# Altium PCB Main.PcbDoc
Units mil, origin at the board's own origin, x right, y up, seen from the top; angles counter-clockwise.
Board outline 1600 x 3464 mil, 2 copper layers (Top Layer, Bottom Layer), stack 61.811 mil thick; 62 components, 30 nets, 155 pads, 84 vias.
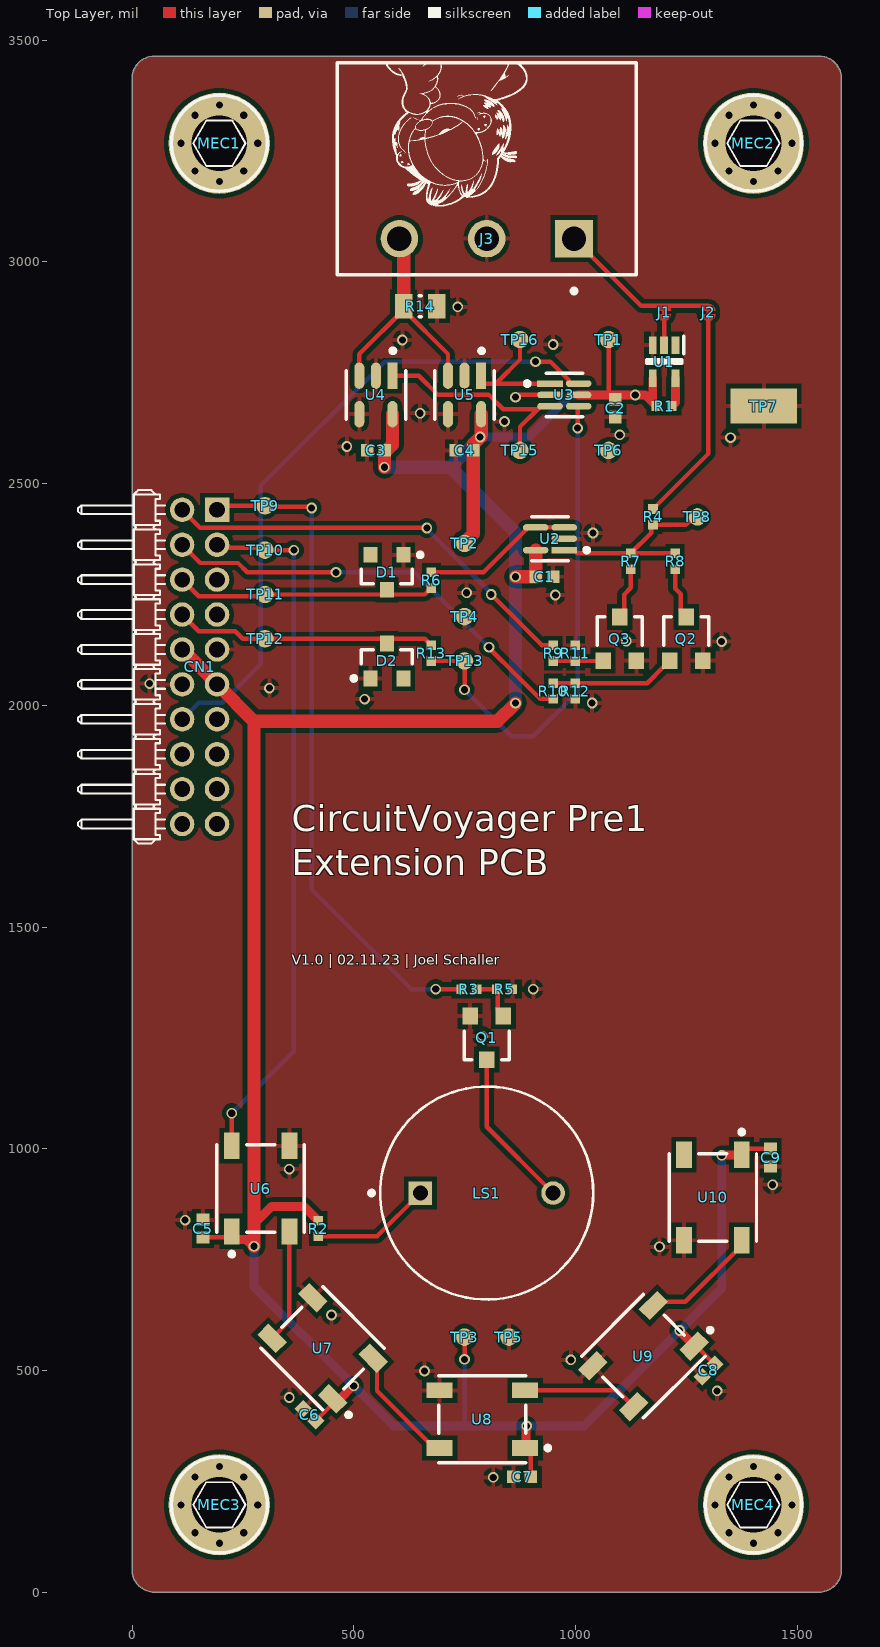
[diagram p0: Top Layer view]
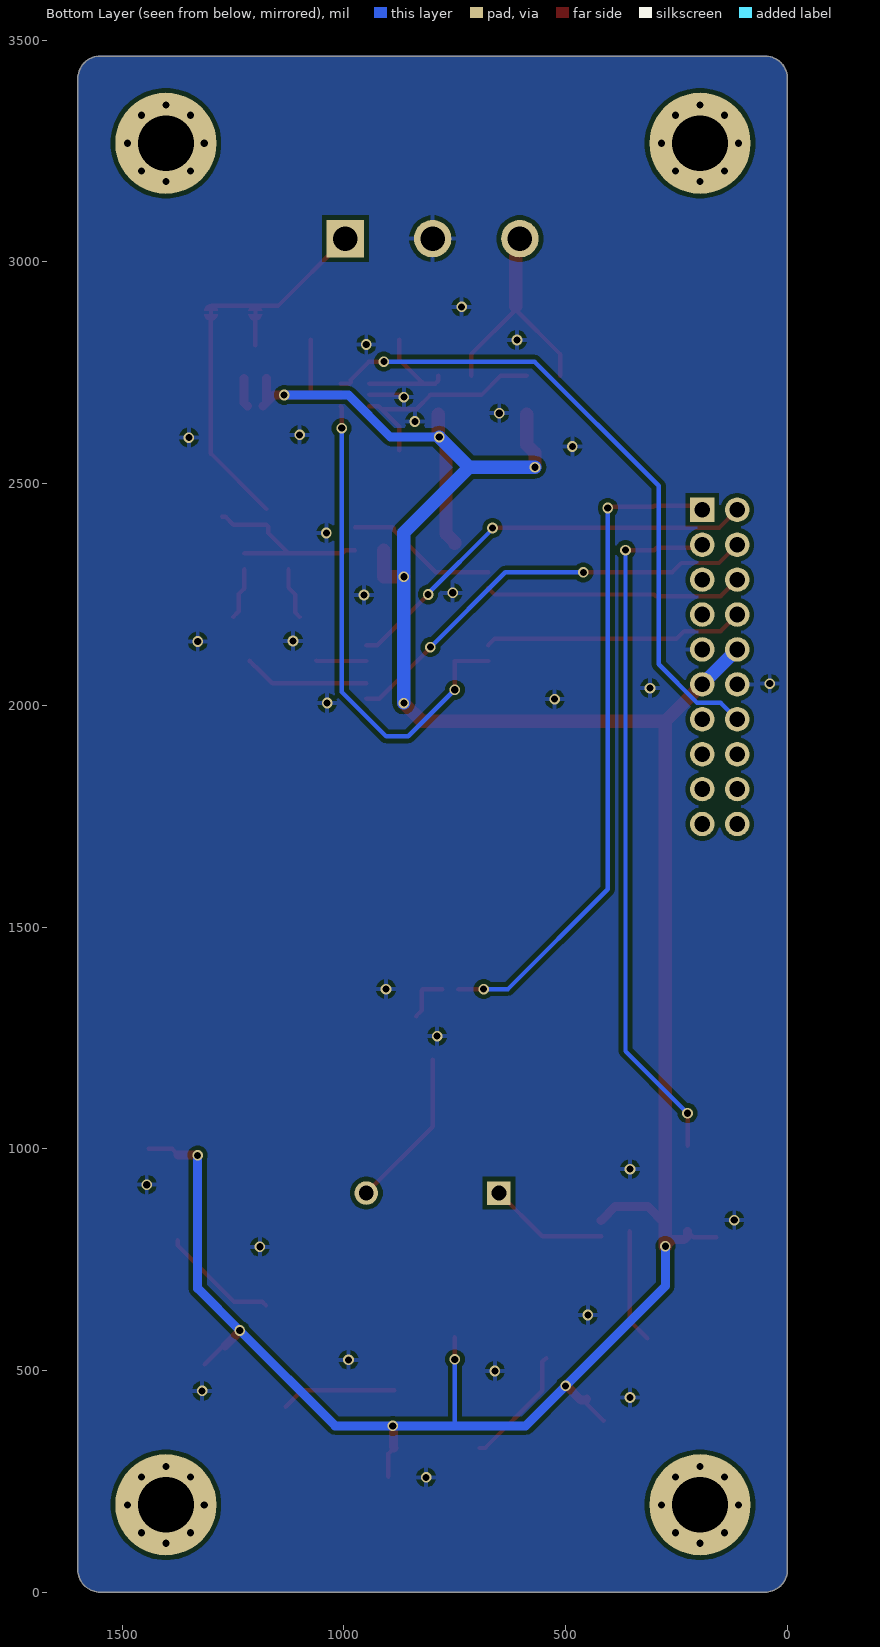
[diagram p1: Bottom Layer view, seen from below]
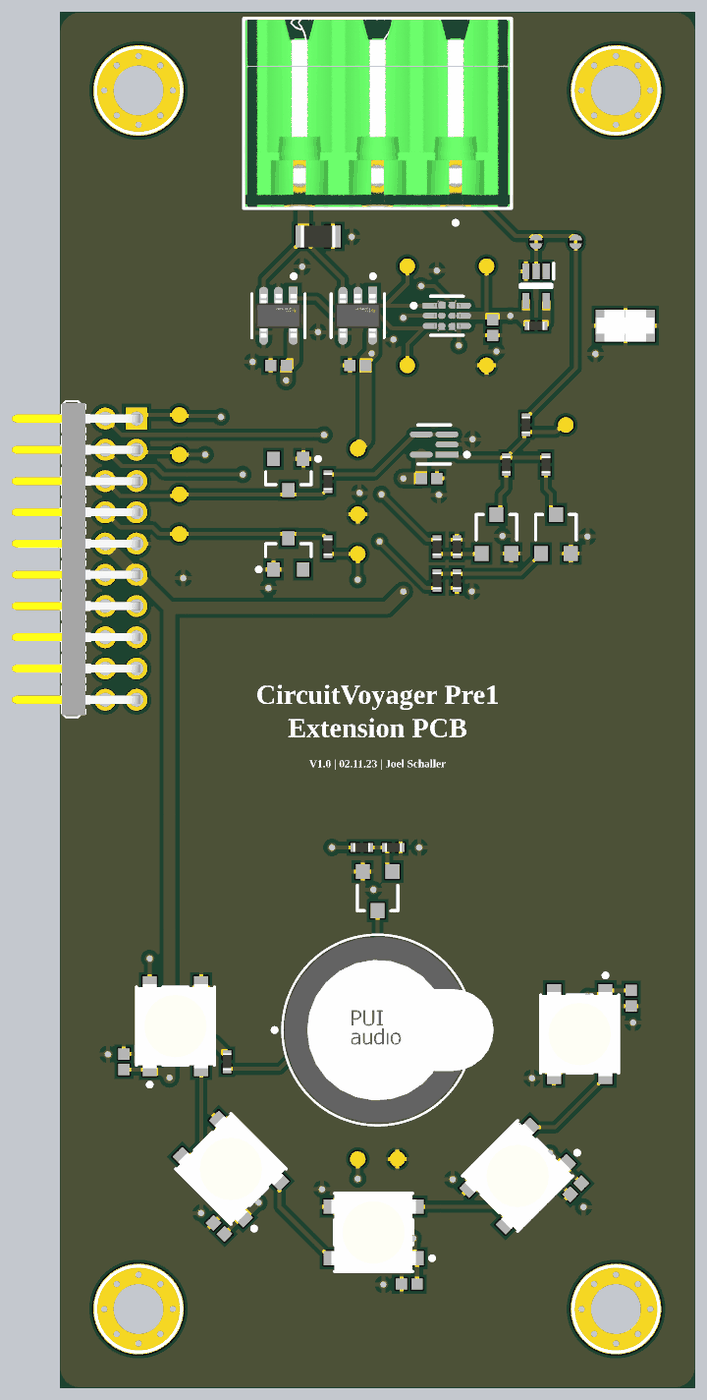
[diagram p2: 3D render of the assembled board from above, using the file's embedded part models]

## Layer stack, top to bottom
Top Solder: solder mask 0.5, Solder Resist, Dk 3.8
Top Layer: signal copper 1.378
Dielectric: core 59.0551, FR-4, Dk 4.5
Bottom Layer: signal copper 1.378
Bottom Solder: solder mask 0.5, Solder Resist, Dk 3.8

## Board outline
0,50 0,3414 cw(c50,3414) 50,3464 1550,3464 cw(c1550,3414) 1600,3414 1600,50 cw(c1550,50) 1550,0 50,0 cw(c50,50)

## Design rules (kind name [scope] priority, off if disabled: settings)
Clearance [All] p1: gap=10 ignorepadtopadclearanceinfootprint=FALSE except(0: Arc-Hole Track-Hole SMDPad-Hole THPad-Hole Via-Hole Fill-Hole Poly-Hole Region-Hole Text-Hole; 5: Arc-SMDPad Arc-THPad Track-SMDPad Track-THPad SMDPad-SMDPad SMDPad-THPad THPad-THPad)
MinimumSolderMaskSliver [All] p1: minsoldermaskwidth=2
PolygonConnect [All] p1: connectstyle=Relief reliefconductorwidth=10 reliefentries=4 polygonreliefangle="90 Angle" airgapwidth=10
RoutingVias [All] p1: holewidth=12 width=25 viastyle="Through Hole" minholewidth=10 minwidth=20 maxholewidth=28 maxwidth=50
SolderMaskExpansion SolderMaskExpansion_1 [All] p1: expansion=4 istentingtop=FALSE
SolderMaskExpansion [All] p2: expansion=4 istentingtop=FALSE
Width [All] p1: maxlimit=30 minlimit=10 preferedwidth=10 minimp=50.000000 maximp=50.000000 favimp=50.000000
29 further rules are at their usual default settings.

## Components (designator, comment, footprint, x,y, rotation, side; value= is the part's Value field where it differs from the comment)
C1 "C0402" SMD_CAPC1005X06N 930,2290 r0 top value=100n
C2 "C0402" SMD_CAPC1005X06N 1090,2670 r270 top value=100n
C3 "C0402" SMD_CAPC1005X06N 550,2575 r180 top value=100n
C4 "C0402" SMD_CAPC1005X06N 750,2575 r180 top value=100n
C5 "C0402" SMD_CAPC1005X06N 160,820 r270 top value=100n
C6 "C0402" SMD_CAPC1005X06N 400,400 r315 top value=100n
C7 "C0402" SMD_CAPC1005X06N 880,260 r0 top value=100n
C8 "C0402" SMD_CAPC1005X06N 1300,500 r45 top value=100n
C9 "C0402" SMD_CAPC1005X06N 1440,980 r90 top value=100n
CN1 "Header 10x2 STMod+" CON_SAMTEC_TMM-110-01-L-D-RA__STMOD+ 62.99,2086.61 r270 top
D1 "MMBZ5227BLT1G" ONSC-SOT-23-3-318-08_V 575,2300 r270 top
D2 "MMBZ5227BLT1G" ONSC-SOT-23-3-318-08_V 575,2100 r90 top
J1 "SOLDERJUMPER_CLOSED_1MM" SOLDERBRIDGE_CLOSED_1MM 1200,2886.22 r90 top net-tie
J2 "SOLDERJUMPER_CLOSED_1MM" SOLDERBRIDGE_CLOSED_1MM 1300,2886.22 r90 top net-tie
J3 "1757488" FP-1757488-MFG 800,3210 r180 top
LS1 "AI-1223-TWT-3V-2-R" FP-AI-1223-TWT-3V-2-R-MFG 800,900 r0 top
MEC1 "Screw Hole M3" "Screw M3 ISO 7380-1" 196.85,3267.72 r0 top
MEC2 "Screw Hole M3" "Screw M3 ISO 7380-1" 1401.57,3267.72 r0 top
MEC3 "Screw Hole M3" "Screw M3 ISO 7380-1" 196.85,196.85 r0 top
MEC4 "Screw Hole M3" "Screw M3 ISO 7380-1" 1401.57,196.85 r0 top
Q1 "AO3400" AO-SOT23-3_V 800,1250 r180 top
Q2 "AO3400" AO-SOT23-3_V 1250,2150 r0 top
Q3 "AO3400" AO-SOT23-3_V 1100,2150 r0 top
R1 "R0402" SMD_RESC1005X04N 1200,2675 r0 top value=620R
R2 "R0402" SMD_RESC1005X04N 420,820 r90 top value=220R
R3 "R0402" SMD_RESC1005X04N 760,1360 r180 top value=1K
R4 "R0402" SMD_RESC1005X04N 1175,2425 r90 top value=4M7
R5 "R0402" SMD_RESC1005X04N 840,1360 r180 top value=10K
R6 "R0402" SMD_RESC1005X04N 675,2282.28 r90 top value=100R
R7 "R0402" SMD_RESC1005X04N 1125,2325 r90 top value=10M
R8 "R0402" SMD_RESC1005X04N 1225,2325 r90 top value=2M2
R9 "R0402" SMD_RESC1005X04N 950,2117.72 r90 top value=1K
R10 "R0402" SMD_RESC1005X04N 950,2032.28 r270 top value=1K
R11 "R0402" SMD_RESC1005X04N 1000,2117.72 r270 top value=10K
R12 "R0402" SMD_RESC1005X04N 1000,2032.28 r90 top value=10K
R13 "R0402" SMD_RESC1005X04N 675,2117.72 r270 top value=100R
R14 "R0805" SMD_RESC2012X05N 650,2900 r180 top value=50m
TP1 "Test Point Small" SMD_PAD_1mm 1075,2825 r90 top
TP2 "Test Point Small" SMD_PAD_1mm 750,2365 r90 top
TP3 "Test Point Small" SMD_PAD_1mm 750,575 r90 top
TP4 "Test Point Small" SMD_PAD_1mm 750,2200 r90 top
TP5 "Test Point Small" SMD_PAD_1mm 850,575 r90 top
TP6 "Test Point Small" SMD_PAD_1mm 1075,2575 r90 top
TP7 "Keystone" KEYSTONE_5019 1425,2675 r180 top
TP8 "Test Point Small" SMD_PAD_1mm 1275,2425 r90 top
TP9 "Test Point Small" SMD_PAD_1mm 300,2450 r90 top
TP10 "Test Point Small" SMD_PAD_1mm 300,2350 r90 top
TP11 "Test Point Small" SMD_PAD_1mm 300,2250 r90 top
TP12 "Test Point Small" SMD_PAD_1mm 300,2150 r90 top
TP13 "Test Point Small" SMD_PAD_1mm 750,2100 r90 top
TP15 "Test Point Small" SMD_PAD_1mm 875,2575 r90 top
TP16 "Test Point Small" SMD_PAD_1mm 875,2825 r90 top
U1 "PSSI2021SAY,115" SOT65P210X100-5N 1200,2775 r270 top
U2 "LM321LVIDCKR" FP-DCK0005A-IPC_B 942.71,2375.59 r180 top
U3 "TMUX1248DCKR" FP-DCK0006A-IPC_B 975,2700 r0 top
U4 "INA180A4IDBVR" FP-DBV0005A-IPC_B 550,2700 r270 top value=200V/V
U5 "INA180A2IDBVR" FP-DBV0005A-IPC_B 750,2700 r270 top value=50V/V
U6 "WS2812B" ADAI-WS2812B_V 290,910 r90 top
U7 "WS2812B" ADAI-WS2812B_V 430,550 r135 top
U8 "WS2812B" ADAI-WS2812B_V 790,390 r180 top
U9 "WS2812B" ADAI-WS2812B_V 1153.55,532.3 r225 top
U10 "WS2812B" ADAI-WS2812B_V 1310,890 r270 top

## Footprints (in the part's own frame and the unit in brackets; to place one, negate y for a bottom-side part, rotate by r counter-clockwise, add the part's x,y. Pads: shape width x height; smd on the part's side, far side on the other; paste and mask are expansions set on the pad)
ADAI-WS2812B_V [mm] "SMD, 4-Leads, Body 5x5mm, Pitch 3.3mm"
  rect 1.5x0.9 smd: 1(-2.45,1.65) 2(-2.45,-1.65) 3(2.45,-1.65) 4(2.45,1.65)
  silkscreen extent -3.87,-2.5 2.5,2.5, body extent -2.7,-2.5 2.7,2.5, height 1.69
AO-SOT23-3_V [mm] "SOT23, 3-Leads, Body 3.016x2.8mm, Pitch 0.95mm"
  rect 0.9x0.95 smd: 1(-0.95,-1.25) 2(0.95,-1.25) 3(0,1.25)
  silkscreen extent -1.3,-0.38 1.3,1.25, body extent -1.14,-1.25 1.17,1.36, height 1.25
CON_SAMTEC_TMM-110-01-L-D-RA__STMOD+ [mm]
  rect 1.4x1.4 hole 0.9 mask+0.05: 1(-9,3.27)
  round 1.4 hole 0.9 mask+0.05: 2(-7,3.27) 3(-5,3.27) 4(-3,3.27) 5(-1,3.27) 6(1,3.27) 7(3,3.27) 8(5,3.27) 9(7,3.27) 10(9,3.27) 11(-9,1.27) 12(-7,1.27) 13(-5,1.27) 14(-3,1.27) 15(-1,1.27) 16(1,1.27) 17(3,1.27) 18(5,1.27) 19(7,1.27) 20(9,1.27)
  silkscreen extent -10.12,-4.7 10.13,0.3, body extent -10.15,-6.35 10.15,3.52, height 4
FP-1757488-MFG [mm]
  rect 2.15x2.15 hole 1.4 paste-2539.97 mask+0: 1(-5,4)
  round 2.15 hole 1.4 paste-2539.97 mask+0: 2(0,4) 3(5,4)
  silkscreen extent -8.57,-6.07 8.57,7.12, body extent -8.67,-6.17 8.67,6.17, height 0.25
FP-AI-1223-TWT-3V-2-R-MFG [mm]
  rect 1.35x1.35 hole 0.85 paste-2539.97 mask+0: 1(-3.8,0)
  round 1.35 hole 0.85 paste-2539.97 mask+0: 2(3.8,0)
  silkscreen extent -6.72,-6.1 6.1,6.1, body extent -6.2,-6.2 6.2,6.2, height 0.25
FP-DBV0005A-IPC_B [mm]
  rect 1.505x0.572 smd paste+0 mask+0: 1(-1.1,0.95)
  rrect100% 1.505x0.572 smd paste+0 mask+0: 2(-1.1,0) 3(-1.1,-0.95) 4(1.1,-0.95) 5(1.1,0.95)
  silkscreen extent -2.65,-1.7 1.4,1.7, body extent -2.1,-1.7 2.1,1.7, height 0.25
FP-DCK0005A-IPC_B [mm]
  rect 1.464x0.376 smd paste+0 mask+0: 1(-0.82,0.65)
  rrect100% 1.464x0.376 smd paste+0 mask+0: 2(-0.82,0) 3(-0.82,-0.65) 4(0.82,-0.65) 5(0.82,0.65)
  silkscreen extent -2.23,-1.25 1.05,1.25
FP-DCK0006A-IPC_B [mm]
  rect 1.464x0.376 smd paste+0 mask+0: 1(-0.82,0.65)
  rrect100% 1.464x0.376 smd paste+0 mask+0: 2(-0.82,0) 3(-0.82,-0.65) 4(0.82,-0.65) 5(0.82,0) 6(0.82,0.65)
  silkscreen extent -2.25,-1.25 1.05,1.25, body extent -1.8,-1.25 1.8,1.25, height 0.25
KEYSTONE_5019 [mm]
  rect 3.8x2.03 smd: 1(0,0)
  body extent -1.91,-1.01 1.91,1.01, height 2.29
ONSC-SOT-23-3-318-08_V [mm] "SOT23, 3-Leads, Body 2.92x1.3mm, Pitch 0.95mm"
  rect 0.9x0.8 smd: 1(-1,0.95) 2(-1,-0.95) 3(1,0)
  silkscreen extent -1.12,-1.46 0.65,2.03, body extent -0.65,-1.46 0.65,1.46, height 1.11
"Screw M3 ISO 7380-1" [mm] "Screw M3 ISO 7380-1"
  round 5.8 hole 3.2: 1(0,0)
  silkscreen extent -2.75,-2.75 2.75,2.75
SMD_CAPC1005X06N [mm] "Chip Capacitor, 2-Leads, Body 1.00x0.50mm, 0402, IPC Medium Density"
  rect 0.72x0.72 smd: 1(-0.5,0) 2(0.5,0)
  body extent -0.53,-0.28 0.53,0.27, height 0.55
SMD_PAD_1mm [mm] "Connector, SMD, single pad, 1mm"
  round 1 smd paste-1.5: 1(0,0)
SMD_RESC1005X04N [mm] "Chip Resistor, 2-Leads, Body 1.00x0.50mm, 0402, IPC Medium Density"
  rect 0.55x0.55 smd: 1(-0.45,0) 2(0.45,0)
  body extent -0.53,-0.28 0.53,0.28, height 0.4
SMD_RESC2012X05N [mm] "Chip Resistor, 2-Leads, Body 2.05x1.25mm, 0805, IPC Medium Density"
  rect 1x1.4 smd: 1(-0.95,0) 2(0.95,0)
  silkscreen extent -0.05,-0.6 0.05,0.6, body extent -1.1,-0.7 1.1,0.7, height 0.5
SOLDERBRIDGE_CLOSED_1MM [mil] "Solder bridge, closed, 1mm dia"
  round 1 smd mask-196.85: 1(-13.78,0) 2(13.78,0)
  Top Layer region: -5,3.94 -5,-3.94 5,-3.94 5,3.94
  Top Layer region: -3.94,15.75 -3.94,-15.75 -9.76,-14.42 -14.63,-10.96 -17.8,-5.9 -18.8,-0.01 -18.8,-0.01 -17.81,5.88 -14.63,10.95 -9.76,14.41 -3.94,15.75
  Top Layer region: 3.94,-15.75 3.96,0.01 3.94,15.75 9.76,14.42 14.63,10.96 17.8,5.9 18.8,0.01 18.8,0.01 17.81,-5.88 14.63,-10.95 9.76,-14.41 3.94,-15.75
SOT65P210X100-5N [mm]
  rect 1x0.45 smd: 1(-0.95,0.65) 2(-0.95,0) 3(-0.95,-0.65) 4(0.95,-0.65) 5(0.95,0.65)
  silkscreen extent -1.45,-1 0.1,1.12

## Part data
C1 C2 C3 C4 C5 C6 C7 C8 C9: library part CMP-02708-2, "CERCAP 100n 16V 5% X7R 0402", Manufacturer=KEMET, Manufacturer Part Number=C0402C104J4RAC7867, Supplier Part Number=399-C0402C104J4RAC7867CT-ND, Supplier=Digi-Key
CN1: library part MCD-00288, "Header 10x2, 2mm, RA, TH, Height 3.20mm/3.50mm,BF060-20A-B-0400-0280-0305-L-D", Alternate_Manufacturer=JIUBABA, Alternate_Manufacturer_Part_Number=PH200210C-07000, Manufacturer=SAMTEC, Manufacturer_Part_Number=TMM-110-01-L-D-RA, Component_Country_Of_Origin="China, Costa Rica, Malaysia, United States, Vietnam", ComponentLink1Description=Datasheet, ComponentLink1URL=http://tunmcdsvn.tun.st.com/Component_Documentation_Library/Trunk/Connector/SAMTEC_TMM(TH)_Series/, ECCN_EU=n/a, ECCN_US=n/a, ID=2581, Internal_Part_Number=MCD-00288, Order_Code_Digikey=SAM10228-ND, Order_Code_Farnell=3515054, Order_Code_RS=180-3469, Part_Preference=Recommended, Part_Type=Connector, Provided_By=SUBCO, ShowFields=YES, Status=Released
D1 D2: library part CMP-1060-00983-1, "Zener Voltage Regulator, 225 mW, 3-Pin SOT-23, Pb-Free, Tape and Reel", Manufacturer="On Semiconductor", ComponentLink1Description="Manufacturer URL", ComponentLink1URL=http://www.onsemi.com/, ComponentLink2Description=Datasheet, ComponentLink2URL=http://www.onsemi.cn/pub_link/Collateral/MMBZ5221BLT1-D.PDF, ComponentLink3Description="Package Specification", ComponentLink3URL=http://www.onsemi.cn/pub_link/Collateral/318-08.PDF, DatasheetVersion="Rev. 12", Mounting Technology="Surface Mount", PackageDescription="3-Pin Small Outline Transistor, Body 2.92 x 1.3 mm, Pitch 0.95 mm", PackageReference=SOT-23-3-318-08, PackageVersion="Rev. AP, 11/2009", Packing="Tape and Reel", PartNumber=MMBZ5227BLT1G, RoHS=Pb-Free, VZ Typ (V)=3.6V
J1 J2: library part CMPL-001-0448-A.4, "TP SOLDERJUMPER CLOSED 1mm"
J3: library part CMP-09399-000001-1, "TERM BLOCK HDR 3POS 90DEG 5MM", Current Rating=12A, Manufacturer="Phoenix Contact", Package=0, Voltage Rating=320V, Automotive=No, Category=Conn, ComponentLink2Description=Datasheet, ComponentLink2URL=https://www.phoenixcontact.com/online/portal/us/?uri=pxc-oc-itemdetail:pid=1757488&library=usen&pcck=P-11-02-11&tab=1&selectedCategory=ALL#drawings, Conn Gender=Male, Conn Orientation="Right Angle", Contact Material=Tin, Device Class L1=Connectors, Device Class L2="Headers and Wire Housings", Device Class L3=unset, Digikey Description="TERM BLOCK HDR 3POS 90DEG 5MM", Footprint Url=https://www.phoenixcontact.com/online/portal/us/pxc/product_detail_page/!ut/p/z1/5Vdbc6IwFP4r9sG3jQkQLj4idZWqrRZdlRcmhOiky62Atttfv4l13eq0-tDxCSYDuZzznXwn-TIE-nAB_ZRs-ZpUPEtJLNpL3wimnWm3O1YN5WGid5B7qzvdIX5U-vcq_AV96JcsZrRikUMqts6KP3BpD4dyoCIhXCqyllP6Gy7HQFEAUsVb9sU8LIi03pQs3RnxSJibuoktS7az1dhxBqduFa9iJjoLnoqYgPKCbnjVCDNSRA2apamYS1Y0QGPkTTt2Q_2hN1FDAz3R8w97fpaWLcKcZ_3uj754bHTJfyn8zUDtKUjpY2XUm47aaDLrjyY_J-3HiWdC79P8_E9nwSjjW1YIJJm3Ios2tLplFeFx6VYscY8T-eUCnWY8j1ZJFrE9bFZyuQ-Ogoj2lL1W-75PVlVAxCRdb8hawpxnquLaMDVqw1SvDdPa6NStjU7d2ujUrY1O3dro1K7N7rVrcyLZmmC67AiG-lO-nsA76PMwab3QpIVa-Stt7YMG0Y5akEvQuXOwn8uAF_52dwZnfmc9lgYzLxgvnJl3YbqWBudbzl7gLM2KRFwhvPckyCRGyEIMIxOQSNUBNlUGCGpTEKI2thjGKxXpsI8uRHhA34xwAV69Kjy-LvzguskZKFeFd747-7uzW32I5YWWPz0_-zb0xVWxkipdyKOjiV5Y2EQJ4aK6V1TZRDEvq52iRD2nYXC4XpZBflB0E0VUt0ximCDUMQLYMAxAVIQBY5oaGitT0doWzJPE0vYFzBZvUxa-fSyrD-PvJbi_17dHBZBjHxZaSDtx0_PtidsVQwG_7YKeE1qjrqavk-DkU9o3N38BJx0ofA!!/p0/IZ7_2G101H41MGTM90QUHMQFQ9RQI5=CZ6_TBTEEP261OQ5B0ID5CEL4R1HN2=LA0=EdownloadId!6315992=action!downlo, Height=8.75mm, Lead Free=Yes, Manufacturer Part Number=1757488, Mouser Description="Pluggable Terminal Blocks 3 Pos 5mm pitch Through Hole Header", Number Of Contacts=3, Number Of Rows=1, Octopart=https://octopart.com/1757488-phoenix+contact-37691, Pitch=5mm, RoHS=TRUE
LS1: library part CMP-103888-000003-1, "BUZZER MAGNETIC 3V 12MM TH", Frequency=2.3kHz, Max Operating Temperature=70°C, Max Supply Current=30mA, Max Supply Voltage (DC)=4V, Min Operating Temperature=-20°C, Min Supply Voltage (DC)=2V, Nominal Supply Voltage (DC)=3V, Contact Plating=Tin, Diameter=12mm, Height=7.5mm, Input Type=DC, Mount="Through Hole", Operating Supply Current=30mA, Packaging=Tray, Sensing Method=Magnetic, Series=AI, Termination="PC Pins", Voltage Rating=3V
MEC1 MEC2 MEC3 MEC4: library part CMPL-001-0477-A.6, "EMECH Generic Screw Hole - different sizes"
Q1 Q2 Q3: library part CMP-0278-00001-1, "N-channel Enhancement Mode Field-Effect Transistor; 5.8A/30V", Drain-Source Voltage Limit="30 V", Gate-Source Voltage Limit="+/-12 V", Junction Temperature="-55 to 150 degC", Manufacturer="Alpha and Omega", Channel Type=N, ComponentLink1Description="Manufacturer URL", ComponentLink1URL=http://www.aosmd.com/, ComponentLink2Description=Datasheet, ComponentLink2URL=http://www.aosmd.com/res/data_sheets/AO3400.pdf, ComponentLink3Description="Package Specification", ComponentLink3URL=http://www.aosmd.com/res/packaging_information/SOT-23.pdf, DatasheetVersion="Rev.8, 12/2011", Mounting Technology="Surface Mount", PackageDescription="3-Pin SOT23, 3.016 x 2.8 mm Body, 0.95 mm Pitch", PackageReference=SOT23, PartNumber=AO3400, Storage Temperature="-55 to 150 degC"
R1: library part CMP-01484-1, "RES 620R 62.5mW 1% 0402", Manufacturer=YAEGO, Manufacturer2="Vishay Dale", Manufacturer2 Part Number=CRCW0402620RFKED, Manufacturer Part Number=RC0402FR-07620RL, Supplier2 Part Number=541-620LCT-ND, Supplier Part Number=311-620LRCT-ND, Supplier=Digi-Key, Supplier2=Digi-Key
R2: library part CMP-01473-1, "RES 220R 62.5mW 1% 0402", Manufacturer=YAEGO, Manufacturer2="Vishay Dale", Manufacturer2 Part Number=CRCW0402220RFKED, Manufacturer Part Number=RC0402FR-07220RL, Supplier2 Part Number=541-220LCT-ND, Supplier Part Number=311-220LRCT-ND, Supplier=Digi-Key, Supplier2=Digi-Key
R3 R9 R10: library part CMP-01489-1, "RES 1K 62.5mW 1% 0402", Manufacturer=YAEGO, Manufacturer2="Vishay Dale", Manufacturer2 Part Number=CRCW04021K00FKED, Manufacturer Part Number=RC0402FR-071KL, Supplier2 Part Number=541-1.00KLCT-ND, Supplier Part Number=311-1.00KLRCT-ND, Supplier=Digi-Key, Supplier2=Digi-Key
R4: library part CMP-01577-1, "RES 4M7 62.5mW 1% 0402", Manufacturer=YAEGO, Manufacturer2="Vishay Dale", Manufacturer2 Part Number=CRCW04024M70FKED, Manufacturer Part Number=RC0402FR-074M7L, Supplier2 Part Number=541-4.70MLCT-ND, Supplier Part Number=13-RC0402FR-074M7LCT-ND, Supplier=Digi-Key, Supplier2=Digi-Key
R5 R11 R12: library part CMP-01513-1, "RES 10K 62.5mW 1% 0402", Manufacturer=YAEGO, Manufacturer2="Vishay Dale", Manufacturer2 Part Number=CRCW040210K0FKED, Manufacturer Part Number=RC0402FR-0710KL, Supplier2 Part Number=541-10.0KLCT-ND, Supplier Part Number=311-10.0KLRCT-ND, Supplier=Digi-Key, Supplier2=Digi-Key
R6 R13: library part CMP-01465-1, "RES 100R 62.5mW 1% 0402", Manufacturer=YAEGO, Manufacturer2="Vishay Dale", Manufacturer2 Part Number=CRCW0402100RFKED, Manufacturer Part Number=RC0402FR-07100RL, Supplier2 Part Number=541-100LCT-ND, Supplier Part Number=311-100LRCT-ND, Supplier=Digi-Key, Supplier2=Digi-Key
R7: library part CMP-01585-1, "RES 10M 62.5mW 1% 0402", Manufacturer=YAEGO, Manufacturer2="Vishay Dale", Manufacturer2 Part Number=CRCW040210M0FKED, Manufacturer Part Number=RC0402FR-0710ML, Supplier2 Part Number=541-10.0MLCT-ND, Supplier Part Number=311-10.0MLRCT-ND, Supplier=Digi-Key, Supplier2=Digi-Key
R8: library part CMP-01569-1, "RES 2M2 62.5mW 1% 0402", Manufacturer=YAEGO, Manufacturer2="Vishay Dale", Manufacturer2 Part Number=CRCW04022M20FKED, Manufacturer Part Number=RC0402FR-072M2L, Supplier2 Part Number=541-2.20MLCT-ND, Supplier Part Number=13-RC0402FR-072M2LCT-ND, Supplier=Digi-Key, Supplier2=Digi-Key
R14: library part CMPL-001-0286-A.2, "RES 0R05 125mW 1% 0805"
TP1 TP2 TP3 TP4 TP5 TP6 TP8 TP9 TP10 TP11 TP12 TP13 TP15 TP16: library part CMP-02902-2, "TP TESTPOINT MULTIPLE_SIZE"
TP7: library part CMPL-001-0505-7, "TP SMD 3.81x 2.03mm", Manufacturer="Keystone Electronics", Manufacturer Part Number=5019, Supplier Part Number=36-5019CT-ND, Design Item ID=5019, Source=5019.SchLib, Supplier=Digi-Key
U1: library part PSSI2021SAY_115, "NEXPERIA - PSSI2021SAY,115 - IC, CURRENT SOURCE, 50MA, 75V,SOT353", Manufacturer_Name=Nexperia, Mouser Part Number=771-PSSI2021SAY-T/R, Arrow Part Number=PSSI2021SAY,115, Arrow Price/Stock=https://www.arrow.com/en/products/pssi2021say115/nexperia?region=europe, Datasheet Link=https://assets.nexperia.com/documents/data-sheet/PSSI2021SAY.pdf, Geometry.Height=1mm, Manufacturer_Part_Number=PSSI2021SAY,115, Mouser Price/Stock=https://www.mouser.co.uk/ProductDetail/Nexperia/PSSI2021SAY115?qs=LOCUfHb8d9uGmlRc%2FuHP%2FA%3D%3D
U2: library part CMP-04895-000147-1, "IC OPAMP GP 1 CIRCUIT SC70-5", RoHS Compliant=Yes
U3: library part CMP-04892-000117-1, "3- LOW RON, 5-V, 2:1 (SPDT) GENE"
U4: library part CMP-014-00002-1, "Operational Amplifier, 1 Func, 500uV Offset-Max, PDSO5", Case/Package=LSSOP, Input Offset Voltage-Max=500uV, Max Operating Temperature=125°C, Min Operating Temperature=-40°C, Nominal Supply Voltage=5V, Package Body Material=Plastic, Package Shape=Rectangular, Package Style="SMALL OUTLINE, LOW PROFILE, SHRINK PITCHMeter", Peak Reflow Temperature (Cel)=260°C, Supply Voltage Limit-Max=6V, Temperature Grade=AUTOMOTIVE, Amplifier Type="OPERATIONAL AMPLIFIER", Channels=1, Common-mode Reject Ratio-Nom=100dB, Height - Seated (Max)=1.45mm, JESD-30 Code=R-PDSO-G5, JESD-609 Code=e3, Length=2.9mm, Moisture Sensitivity Level=1, Pins=5, Reach SVHC Compliant=Yes, RoHS Compliant=Yes, Slew Rate=2V/µs, Surface Mount=Yes, Terminal Finish=Tin, Terminal Form="Gull Wing", Terminal Pitch=0.95mm, Terminal Position=DUAL, Unity Gain BW-Nom=350kHz, Width=1.6mm
U5: library part CMP-014-00003-1, "Operational Amplifier, 1 Func, 500uV Offset-Max, PDSO5", Case/Package=LSSOP, Input Offset Voltage-Max=500uV, Max Operating Temperature=125°C, Min Operating Temperature=-40°C, Nominal Supply Voltage=5V, Package Body Material=Plastic, Package Shape=Rectangular, Package Style="SMALL OUTLINE, LOW PROFILE, SHRINK PITCHMeter", Peak Reflow Temperature (Cel)=260°C, Supply Voltage Limit-Max=6V, Temperature Grade=AUTOMOTIVE, Amplifier Type="OPERATIONAL AMPLIFIER", Channels=1, Common-mode Reject Ratio-Nom=100dB, Height - Seated (Max)=1.45mm, JESD-30 Code=R-PDSO-G5, JESD-609 Code=e3, Length=2.9mm, Moisture Sensitivity Level=1, Pins=5, Reach SVHC Compliant=Yes, RoHS Compliant=Yes, Slew Rate=2V/µs, Surface Mount=Yes, Terminal Finish=Tin, Terminal Form="Gull Wing", Terminal Pitch=0.95mm, Terminal Position=DUAL, Unity Gain BW-Nom=350kHz, Width=1.6mm
U6 U7 U8 U9 U10: library part CMP-007-00035-2, "Intelligent Control LED Integrated Light Source, 3.5 to 5.3 V, -25 to 80 degC, 4-Pin SMD, RoHS, Bulk", Manufacturer="Adafruit Industries", Package Description="4-Pin Surface Mount Device, Body 5 x 5 mm, Pitch 3.3 mm", Case/Package=WS2812B, Datasheet URL=https://cdn-shop.adafruit.com/datasheets/WS2812B.pdf, Datasheet Version=May-13, Manufacturer URL=https://www.adafruit.com/, Mounting Technology=SM, Package Reference=WS2812B, RoHS Compliant=False

## Via types
v1: diameter 24, hole 16, Top Layer to Bottom Layer, tented both sides, 84 vias

## Nets (pads, with @x,y where several pads share a name; then routed paths per layer and width w, separated by ;. In a path a pad name is that pad's centre, name@x,y a point inside that pad or via, vN(x,y) a via of type N, cw(c..) or ccw(c..) an arc to the next point about the centre after c; other vN are vias at no path point)
+5V: C1.1 C2.1 C3.1 C4.1 C5.2 C6.2 C7.2 C8.2 C9.2 CN1.6 CN1.15 R1.1 R2.2 TP1.1 TP2.1 TP3.1 U1.4 U2.5 U3.5 U4.5 U5.5 U6.1 U7.1 U8.1 U9.1 U10.1 | length 6962.7
  Top Layer w10: C5.2 212.32,800.32 U6.1@225.04,813.03 ; C6.2 452.27,424.43 U7.1 ; v1(750,525) TP3.1 ; U8.1 886.97,325.04 899.68,312.32 C7.2 ; TP1.1 1075,2704.68 C2.1@1079.68,2700 ; U9.1 1273.26,554.58 C8.2 ; U10.1 1374.96,986.97 1387.68,999.68 C9.2
  Top Layer w20: U6.1 225.04,813.03 225.04,802.72 232.76,795 257.84,795 272.84,780 v1(275,780) ; 275,830 315,870 387.72,870 R2.2 ; U7.1 455.03,433.1 465.94,433.1 497.84,465 v1(500,465) ; U8.1 888.47,327.05 888.47,373.47 v1(890,375) ; U3.5 1079.68,2700 v1(1135,2700) 1157.28,2700 R1.1@1174.41,2682.87 ; U1.4 R1.1@1174.41,2682.87 ; R1.1 R1.1@1174.41,2682.87 ; v1(1235,590) 1235,588.63 1267.69,555.94 U9.1 ; v1(1330,985) 1330.73,985.73 1374.23,985.73 U10.1
  Top Layer w30: CN1.15 CN1.6 275,1963.98 ; v1(275,780) 275,830 275,1963.98 ; v1(569.24,2536.88) 569.24,2569.64 587.4,2587.81 U4.5 ; TP2.1 750,2367.54 769.68,2387.22 769.68,2589.28 785,2604.6 v1(785,2605) 787.4,2607.4 U5.5 ; v1(865,2005) 823.98,1963.98 275,1963.98 ; v1(865,2290) C1.1 910.32,2349.89 U2.5
  Bottom Layer w10: 750,375 v1(750,525)
  Bottom Layer w20: v1(275,780) 275,690 v1(500,465) 590,375 750,375 v1(890,375) 1020,375 v1(1235,590) 1330,685 v1(1330,985) ; v1(785,2605) 895,2605 990,2700 v1(1135,2700)
  Bottom Layer w30: CN1.15 CN1.6 ; v1(569.24,2536.88) 717.29,2536.88 ; v1(785,2605) 785,2604.6 717.29,2536.88 ; v1(865,2005) v1(865,2290) 865,2389.17 717.29,2536.88
A_MEAS: CN1.14 D2.3 R13.1 TP12.1 | length 594.1
  Top Layer w10: CN1.14 150.55,2167.17 232.83,2167.17 250,2150 TP12.1 ; TP12.1@296.62,2150 575,2150 660.43,2150 R13.1
A_PREOV: R13.2 TP13.1 U3.4 | length 1125.3
  Top Layer w10: R13.2 TP13.1 v1(750,2035) ; v1(1005,2625) 1005,2672.19 1007.22,2674.41 U3.4
  Bottom Layer w10: v1(750,2035) 855,1930 905,1930 1005,2030 v1(1005,2625)
A_R1: TP15.1 U3.3 U4.1 | length 498.7
  Top Layer w10: U4.1 646.67,2743.33 690,2700 805,2700 837,2668 914.88,2668 ; TP15.1 875,2628.12 914.88,2668 ; U3.3 921.29,2674.41 914.88,2668
A_R2: TP16.1 U3.1 U5.1 | length 289.5
  Top Layer w10: U5.1 787.4,2731.85 793.66,2725.59 825,2725.59 ; TP16.1 875,2780 825,2730 825,2725.59 ; U3.1 825,2725.59
A_RSEL: CN1.17 U3.6 | length 1488.1
  Top Layer w10: v1(910,2775) 943.66,2775 984.95,2733.71 984.95,2727.81 987.17,2725.59 U3.6
  Bottom Layer w10: CN1.17 150.55,2006.06 203.67,2006.06 290,2092.4 290,2495 570,2775 v1(910,2775)
BUZ: CN1.1 R3.2 TP9.1 | length 1509.6
  Top Layer w10: CN1.1 200.79,2450 TP9.1 302.5,2447.5 402.5,2447.5 v1(405,2445) ; v1(685,1360) R3.2
  Bottom Layer w10: v1(405,2445) 405,1585 630,1360 v1(685,1360)
BUZ+: LS1.1 R2.1 | length 270.9
  Top Layer w10: R2.1 552.68,802.28 LS1.1
BUZ-: LS1.2 Q1.3 | length 362.8
  Top Layer w10: Q1.3 800,1049.61 LS1.2
BUZ_G: Q1.1 R3.1 R5.2 | length 111.6
  Top Layer w10: R3.1 R5.2 824.68,1357.6 824.68,1311.93 Q1.1
CUR_OUT: J1.1 U1.2 | length 60
  Top Layer w10: U1.2 J1.1
CUR_R: R1.2 U1.5 | length 65.9
  Top Layer w20: R1.2 1225.59,2682.87 U1.5
GND: C1.2 C2.2 C3.2 C4.2 C5.1 C6.1 C7.1 C8.1 C9.1 CN1.5 CN1.16 D1.1 D2.1 J3.2 Q1.2 Q2.2 Q3.2 R5.1 R11.1 R12.1 R14.1 TP4.1 TP5.1 TP6.1 TP7.1 U1.3 U2.2 U3.2 U4.2 U4.4 U5.2 U5.4 U6.3 U7.3 U8.3 U9.3 U10.3 | length 79.8
  Top Layer w10: v1(865,2695) 868.79,2695 873.79,2700 U3.2
  other v1: 814.69,258.79 354.69,438.79 1319.69,453.79 659.69,498.79 989.69,523.79 450,625 1189.69,778.79 119.69,838.79 1444.69,918.79 354.69,953.79 789.69,1253.79 905,1360 1037.85,2005.31 524.69,2013.79 309.69,2038.79 39.69,2048.79 1329.69,2143.79 1115,2145 954.69,2248.79 754.69,2253.79 1039.69,2388.79 484.69,2583.79 1349.69,2603.79 1100,2610 840,2640 649.69,2658.79 949.69,2813.79 609.69,2823.79 734.69,2898.79
LED_D: CN1.2 TP10.1 U6.4 | length 1579.9
  Top Layer w10: CN1.2 198.32,2355.62 294.38,2355.62 TP10.1 v1(365,2350) ; v1(225,1080) U6.4 U6.4
  Bottom Layer w10: v1(225,1080) 365,1220 v1(365,2350)
LED_D1: U6.2 U7.4 | length 257.5
  Top Layer w10: U7.4 354.96,611.37 U6.2
LED_D2: U7.2 U8.4 | length 271.5
  Top Layer w10: U7.2 552.49,519.38 552.49,454.28 681.73,325.04 U8.4
LED_D3: U8.2 U9.4 | length 260.1
  Top Layer w10: U8.2 1094.49,454.96 U9.4
LED_D4: U9.2 U10.4 | length 267
  Top Layer w10: U9.2 1184.18,654.8 1248.02,654.8 1374.96,781.73 U10.4
TER_A: J3.3 R14.2 U4.3 U5.3 | length 544.8
  Top Layer w10: U4.3 512.6,2792.13 R14.2@612.6,2892.13 ; R14.2 R14.2@612.6,2892.13 ; U5.3 712.6,2792.13 R14.2@612.6,2892.13
  Top Layer w30: J3.3 612.6,3043.07 R14.2
TER_V: J1.2 J2.2 J3.1 | length 366.9
  Top Layer w10: J3.1 1148.68,2900.69 1199.31,2900.69 J1.2 1200.69,2900.69 1215.69,2900.69 1299.31,2900.69 J2.2
V_GND_R1: Q3.3 R7.1 | length 118.4
  Top Layer w10: Q3.3 1110,2209.21 1110,2250 1125,2265 R7.1
V_GND_R2: Q2.3 R8.1 | length 118.4
  Top Layer w10: R8.1 1225,2263.33 1237.28,2251.04 1237.28,2211.93 Q2.3
V_MEAS: CN1.13 D1.3 R6.1 TP11.1 | length 585.3
  Top Layer w10: CN1.13 150.55,2245.91 295.91,2245.91 TP11.1 660.43,2250 R6.1
V_PREBUF: R4.1 R7.2 R8.2 TP8.1 U2.1 | length 445.6
  Top Layer w10: U2.1 996.42,2350 1003.7,2342.72 R7.2 ; R8.2 R7.2 ; TP8.1 1267.05,2425 1249.34,2407.28 R4.1 1170.85,2403.13 1170.85,2388.57 R7.2
V_PREOV: R6.2 U2.3 U2.4 | length 344.1
  Top Layer w10: R6.2 792.79,2300 888.09,2395.3 888.09,2398.97 890.3,2401.18 U2.3
V_R1_EN: CN1.11 R9.2 | length 966.5
  Top Layer w10: CN1.11 153.94,2400 v1(665,2400) ; v1(810,2250) 924.57,2135.43 R9.2
  Bottom Layer w10: v1(665,2400) 665,2397.5 810,2252.5 v1(810,2250)
V_R1_G: Q3.1 R9.1 R11.2 | length 112.9
  Top Layer w10: R9.1 R11.2 1061.81,2100 Q3.1
V_R2_EN: CN1.12 R10.2 | length 981.8
  Top Layer w10: CN1.12 154.17,2321.02 238.98,2321.02 260,2300 v1(460,2300) ; v1(805,2131.21) 811.53,2124.68 811.53,2123.34 864.37,2070.5 920.3,2014.57 R10.2
  Bottom Layer w10: v1(460,2300) 636.21,2300 v1(805,2131.21)
V_R2_G: Q2.1 R10.1 R12.2 | length 284.2
  Top Layer w10: R10.1 R12.2 1161.81,2050 1198.9,2087.09 1199.88,2087.09 1212.6,2099.8 Q2.1
V_RAW: J2.1 R4.2 | length 481.5
  Top Layer w10: R4.2 1300,2567.72 J2.1
pads on no net: CN1.3 CN1.4 CN1.7 CN1.8 CN1.9 CN1.10 CN1.18 CN1.19 CN1.20 D1.2 D2.2 MEC1.1 MEC2.1 MEC3.1 MEC4.1 U1.1 U10.2
copper on no net:
  other v1: 196.85,110.24 1401.57,110.24 141.73,133.86 251.97,133.86 1346.46,133.86 1456.69,133.86 110.24,196.85 283.46,196.85 1314.96,196.85 1488.19,196.85 141.73,259.84 251.97,259.84 1346.46,259.84 1456.69,259.84 196.85,283.46 1401.57,283.46 196.85,3181.1 1401.57,3181.1 141.73,3204.72 251.97,3204.72 1346.46,3204.72 1456.69,3204.72 110.24,3267.72 283.46,3267.72 1314.96,3267.72 1488.19,3267.72 141.73,3330.71 251.97,3330.71 1346.46,3330.71 1456.69,3330.71 196.85,3354.33 1401.57,3354.33

## Polygon pours and split planes (outlines as drawn)
GND on Top Layer "GND" (solid, pour order 0): 0,50 0,3414 cw(c50,3414) 50,3464 1550,3464 cw(c1550,3414) 1600,3414 1600,50 cw(c1550,50) 1550,0 50,0 cw(c50,50)
GND on Bottom Layer "GND" (solid, pour order 1): 0,50.64 0,3414.64 cw(c50,3414.64) 50,3464.64 1550,3464.64 cw(c1550,3414.64) 1600,3414.64 1600,50.64 cw(c1550,50.64) 1550,0.64 50,0.64 cw(c50,50.64)

## Silkscreen, mask and mechanical layers (free items; w line width, h text height)
Top Overlay:
  drawing of 17 lines, arcs and shapes, not listed
  text "CircuitVoyager Pre1 / Extension PCB" at 360,1597.04 h100
  text "V1.0 | 02.11.23 | Joel Schaller" at 360,1407.04 h40
Bottom Solder:
  drawing of 14 lines, arcs and shapes, not listed
Board Shape:
  the board outline again, w0

## Text inside footprints (layer, text, board x,y; h text height)
CN1: Top Assembly "20" at 92.52,1697.83 h30; Top Assembly "10" at 171.26,1697.83 h30; Top Assembly "11" at 92.52,2516.73 h30; Top Assembly "1" at 171.26,2487.2 h30; Mechanical 14 "11" at 93.5,2465.55 h59.06 r270; Mechanical 14 "1" at 174.21,2448.82 h59.06 r270; Mechanical 14 "20" at 96.46,1756.89 h59.06 r270; Mechanical 14 "10" at 174.21,1756.89 h59.06 r270